# Altium PCB СФ МЭИ ЛБ ПЭ2-18 11.03.04 03.PcbDoc
Units mm, origin at the board's own origin, x right, y up, seen from the top; angles counter-clockwise.
Board outline 28.93 x 15.7 mm, 2 copper layers (Top Layer, Bottom Layer); 14 components, 7 nets, 29 pads, 4 vias.
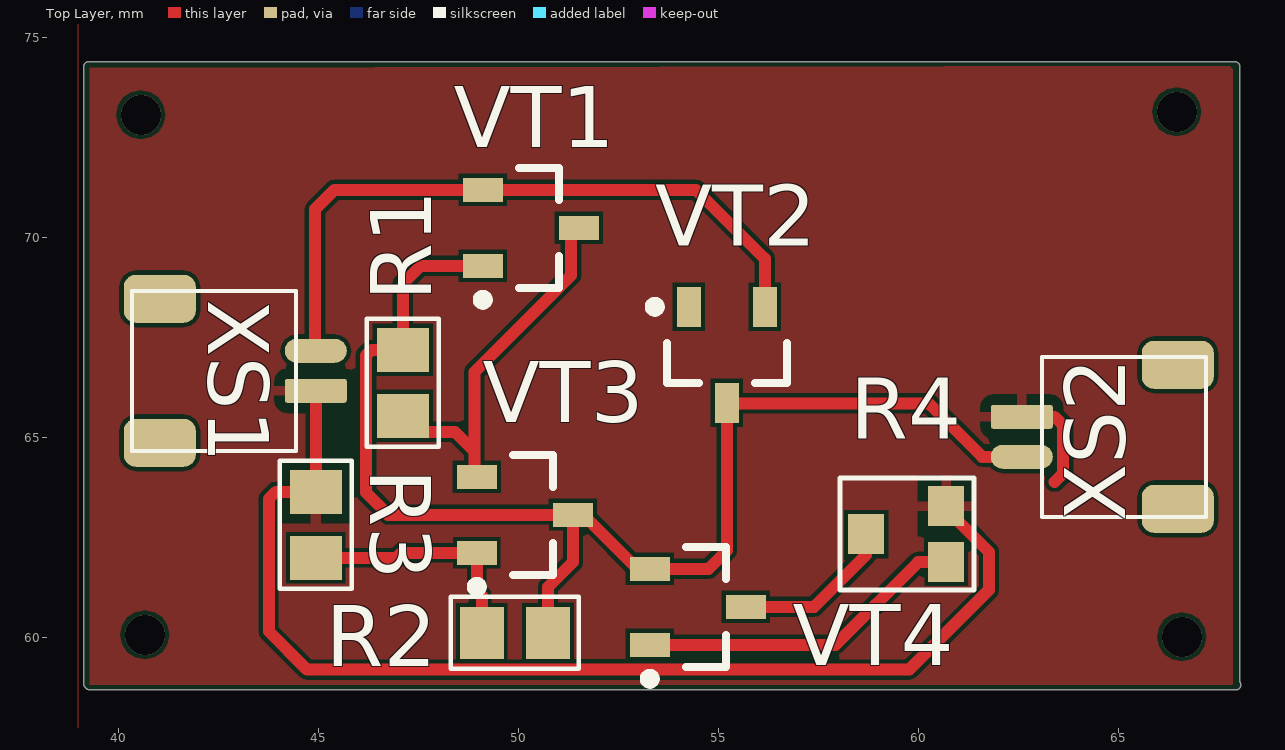
[diagram p0: Top Layer view]
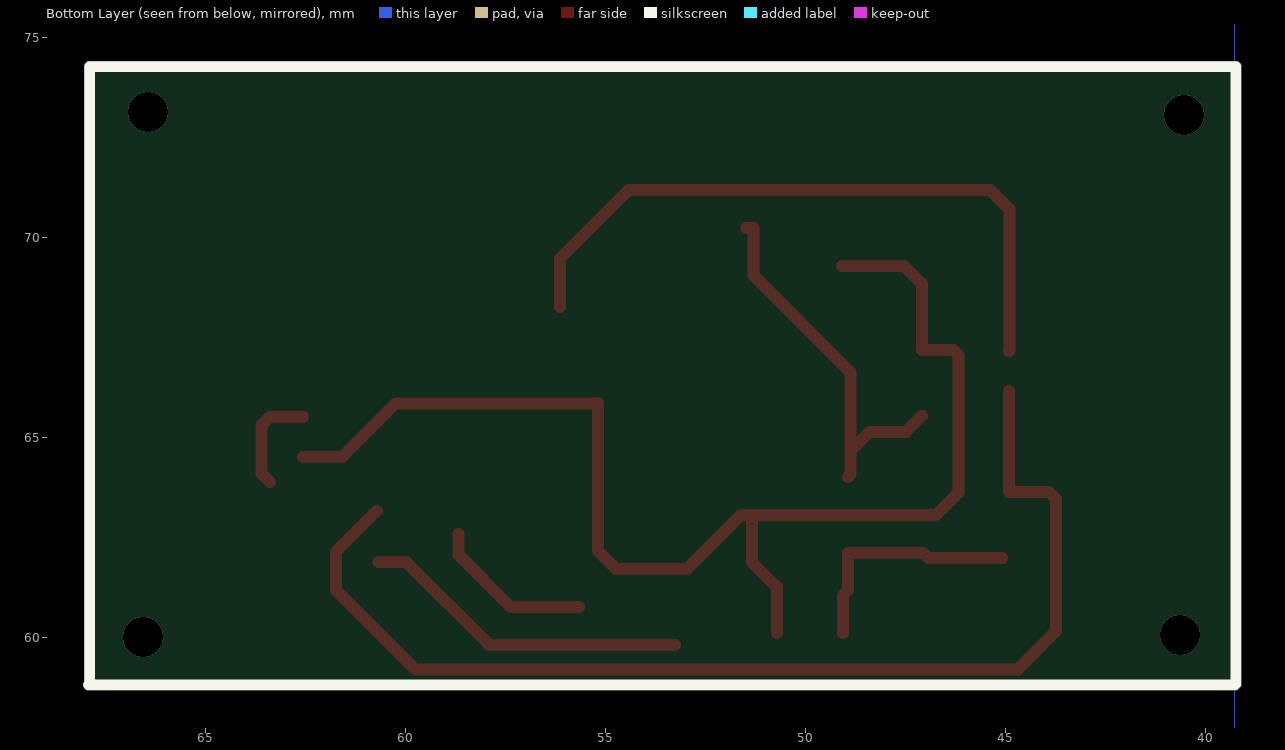
[diagram p1: Bottom Layer view, seen from below]

## Layer stack, top to bottom
Top Solder: solder mask 0.0102, Solder Resist, Dk 3.5
Top Layer: signal copper 0.0356
Dielectric 1: dielectric 0.32, FR-4, Dk 4.8
Bottom Layer: signal copper 0.0356
Bottom Solder: solder mask 0.0102, Solder Resist, Dk 3.5

## Board outline
39.185,58.735 39.16,58.76 39.16,58.759 cw(c39.25,58.85) 39.123,58.85 39.123,74.275 cw(c39.25,74.275) 39.25,74.402 67.9,74.402 cw(c67.9,74.275) 68.027,74.275 68.027,58.901 cw(c67.925,58.825) 68.052,58.825 cw(c67.925,58.825) 67.925,58.698 39.275,58.698 cw(c39.275,58.825)

## Design rules (kind name [scope] priority, off if disabled: settings)
Clearance [All] p1: gap=0.1 ignorepadtopadclearanceinfootprint=FALSE except(0: Arc-Hole Track-Hole SMDPad-Hole THPad-Hole Via-Hole Fill-Hole Poly-Hole Region-Hole Text-Hole)
MinimumAnnularRing MinimumAnnularRing_1 [All] p1: minimumring=0.254
MinimumAnnularRing [All] p2: minimumring=0.254
PolygonConnect [All] p1: connectstyle=Relief reliefconductorwidth=0.254 reliefentries=4 polygonreliefangle="90 Angle" airgapwidth=0.254
RoutingVias [All] p1: holewidth=0.1 width=1.27 viastyle="Through Hole" minholewidth=0.2 minwidth=0.4 maxholewidth=0.2 maxwidth=0.4
SolderMaskExpansion [All] p1: expansion=0.102 istentingtop=FALSE
Width [All] p1: maxlimit=1 minlimit=0.1 preferedwidth=0.3
30 further rules are at their usual default settings.

## Classes and differential pairs
component class "СФ МЭИ ЛБ ПЭ2-18 11.03.04 03 Э3": R1 R2 R3 R4 VT1 VT2 VT3 VT4 XS1 XS2

## Components (designator, comment, footprint, x,y, rotation, side; value= is the part's Value field where it differs from the comment)
R1 "100k" 0805 47.1,66.375 r90 top
R2 "6.2k" 0805 49.9,60.125 r0 top
R3 "6.2k" 0805 44.925,62.825 r270 top
R4 "6.8K" ST32 59.683,62.191 r0 top
VT1 "Полевойтранзистор с изолированым затвором" SOT23 50.3,70.25 r0 top
VT2 "Биполярный транзистор n-p-n" SOT23 55.2,67.075 r270 top
VT3 "Биполярный транзистор n-p-n" SOT23 50.15,63.075 r0 top
VT4 "Полевой транзистор с изолированым затвором n-типа" SOT23 54.475,60.775 r0 top
XS1 "DG126-5.0-0.2P" "CI1102M1H  (F)" 42.725,68.675 r270 top
XS2 "DG126-5.0-0.2P_1" "CI1102M1H  (F)" 64.775,63.025 r90 top
ZBOAS119291683 "Comment" "BOASVIEWdrill:Таблица отверстий:0:0:0:0" 30.3,2328.75 r0 top
ZBOAS278393318 "Comment" "BOASVIEWside:Вид платы сверху:4:0:0:0" 70.7,2370.3 r0 top
ZBOAS291694940 "Comment" "BOASVIEWdrilldrawing:Вид DrillDrawing:4:0:0:1" 74.075,2411.5 r0 top
ZBOAS1939793693 "Comment" "BOASVIEWassembly:Вид спереди для сборочного:4:1:0:101" 492.7,2379.825 r0 top

## Footprints (in the part's own frame and the unit in brackets; to place one, negate y for a bottom-side part, rotate by r counter-clockwise, add the part's x,y. Pads: shape width x height; smd on the part's side, far side on the other; paste and mask are expansions set on the pad)
0805 [mm] "Чип (SMD)"
  rect 1.1x1.3 smd: 1(-0.825,0) 2(0.825,0)
  silkscreen extent -1.6,-0.9 1.6,0.9, body extent -1,-0.63 1,0.63, height 0.5
"BOASVIEWassembly:Вид спереди для сборочного:4:1:0:101" [mm]
"BOASVIEWdrill:Таблица отверстий:0:0:0:0" [mm]
"BOASVIEWdrilldrawing:Вид DrillDrawing:4:0:0:1" [mm]
"BOASVIEWside:Вид платы сверху:4:0:0:0" [mm]
"CI1102M1H  (F)" [mm]
  oval 0.6x1.55 smd: 1(1.5,2.2)
  rrect20% 0.6x1.55 smd: 2(2.5,2.2)
  rrect50% 1.2x1.8 smd: 3(0.2,-1.7) 4(3.8,-1.7)
  silkscreen extent 0,-2.4 4,1.7
SOT23 [mm] "SOT23, 3-Leads, Body 2,92x2,45mm, Pitch 0,95mm, IPC Medium Density"
  rect 1x0.6 smd: 1(-1.2,-0.95) 2(-1.2,0.95) 3(1.2,0)
  silkscreen extent -1.32,-1.92 0.7,1.5, body extent -1.3,-1.52 1.3,1.52, height 1.12
ST32 [mm] "Чип (SMD) поджстроечный"
  rect 0.9x1 smd: 1(-1,0.4) 2(1,1.1) 3(1,-0.3)
  silkscreen extent -1.65,-1 1.7,1.8, body extent -1,-0.63 1,1.53, height 0.5

## Part data
R1: library part "0.125Вт 0805 100 кОм, 5%, Чип резистор (SMD)", "0805-0.125 Вт -100 кОм±5%"
R2 R3: library part "0.125Вт 0805 6.2 кОм, 5%, Чип резистор (SMD)", "0805-0.125 Вт -6.2 кОм±5%"
R4: library part "0.125Вт 0805 6.8 кОм, 5%, подстроечный чип резистор (SMD)", "0805-0.125 Вт -6.8 кОм±5%"
VT1: library part IRFML8244TRPBF, "IRFML8244TRPBF"
VT2: library part BFR540, "BFR540"
VT3: library part BFR540_1, "BFR540"
VT4: library part "BSS83P H6327XTSA1", "BSS83P H6327XTSA1"
XS2: "DG126-5.0-0.2P"

## Via types
v1: diameter 1, hole 1, Top Layer to Bottom Layer, 4 vias

## Nets (pads, with @x,y where several pads share a name; then routed paths per layer and width w, separated by ;. In a path a pad name is that pad's centre, name@x,y a point inside that pad or via, vN(x,y) a via of type N, cw(c..) or ccw(c..) an arc to the next point about the centre after c; other vN are vias at no path point)
GND: R3.1 R4.2 XS1.2 XS2.2 | length 31.3
  Top Layer w0.3: XS1.2 R3.1 43.926,63.65 43.75,63.474 43.75,60.161 44.704,59.207 59.762,59.207 61.75,61.195 61.75,62.15 R4.2@60.725,63.175 ; XS2.2 63.398,65.525 63.602,65.322 63.602,64.103 63.398,63.9
NetR1_1: R1.1 VT1.3 VT3.2 | length 9.6
  Top Layer w0.3: R1.1 47.5,65.15 48.404,65.15 48.888,64.666 ; VT3.2 48.888,64.088 48.888,64.666 ; VT1.3 51.308,70.25 51.308,69.063 48.888,66.642 48.888,64.666
NetR1_2: R1.2 R2.2 VT1.1 VT2.3 VT3.3 VT4.2 XS2.1 | length 33.1
  Top Layer w0.3: VT1.1 47.549,69.3 47.1,68.851 R1.2 46.321,67.2 46.177,67.056 46.177,63.634 46.736,63.075 VT3.3 ; R2.2 50.725,61.265 51.35,61.89 VT3.3 ; VT2.3 VT2.3@55.2,65.862 ; XS2.1 61.586,64.525 60.249,65.862 VT2.3@55.2,65.862 ; VT3.3 51.613,63.075 52.963,61.725 VT4.2 54.746,61.725 55.2,62.179 VT2.3@55.2,65.862
NetR2_1: R2.1 R3.2 VT3.1 | length 6
  Top Layer w0.3: R3.2@45.1,62 46.939,62 47.064,62.125 VT3.1 48.95,61.187 49.075,61.062 R2.1
NetR4_1: R4.1 VT4.3 | length 4.1
  Top Layer w0.3: VT4.3 57.384,60.775 58.683,62.075 R4.1
NetR4_3: R4.3 VT4.1 | length 8.3
  Top Layer w0.3: VT4.1 57.918,59.825 59.984,61.891 R4.3
NetVT1_2: VT1.2 VT2.2 XS1.1 | length 16.9
  Top Layer w0.3: XS1.1 44.907,67.175 44.907,70.714 45.394,71.2 49.1,71.2 54.428,71.2 56.15,69.478 VT2.2
pads on no net: VT2.1 XS1.3 XS1.4 XS2.3 XS2.4
copper on no net:
  other v1: 66.575,60.025 40.65,60.075 40.55,73.075 66.45,73.15

## Polygon pours and split planes (outlines as drawn)
no net on Bottom Layer "GND A" (solid, shelved, pour order 7): 39.275,46.375 39.275,96.4 142.075,96.4 142.075,46.375
GND on Top Layer "GND_L01_P016" (solid, pour order 16): 39.275,74.25 39.275,58.825 67.875,58.825 67.85,58.85 67.85,74.3
no net on Top Layer "GND A" (solid, shelved, pour order 6): 38.981,46.316 38.981,96.341 141.781,96.341 141.781,46.316
no net on Top Overlay "NONET_L01_P-001" (solid): 39.325,73.95

## Silkscreen, mask and mechanical layers (free items; w line width, h text height)
Bottom Overlay:
  lines w0.254: 39.25,58.85 39.275,58.825 ; 39.25,58.85 39.25,74.275 67.9,74.275 67.9,58.85 67.925,58.825 39.275,58.825 ; 39.25,58.85 39.275,58.825
Mechanical 7:
  text "BOASFORMAT|А3|1|0|883070867|165354330|1000000000|4:1|" at 0,2540 h0
  text "BOASFORMAT|А3|101|165354330|883070867|330708660|1000000000|4:1|" at 420,2540 h0
  text "DimV|-442914|-24557086|29389764|974192913|-11230315|118111|4||||js12|False|False|False|False" at 74.65,2474.45 h0
  text "DimH|-45344488|0|74399606|974192913|-44232283|9114174|4||||js12|False|False|False|False" at 188.975,2474.45 h0
  text "DimPos|211269685|956417323|-14301181|-14665354|8|1584121" at 572.95,2466.55 h0
  text "DimPos|102903543|965974409|13061023|-4557087|2|1772217" at 228.2,2465.15 h0
  text "DimPos|141751969|963956693|-10295275|-5620079|2|1772217" at 386.2,2462.725 h0
  text "DimPos|220600394|951525591|-17598425|-14842519|6|1454805" at 605.025,2454.575 h0
  text "DimPos|206200787|950108268|15108267|-15551181|5|1742827" at 485.375,2452.775 h0
  text "DimPos|222312992|950935039|-22185039|-10246063|10|2286542" at 621.025,2441.4 h0
  text "DimPos|236328740|947086614|-21417323|-14045276|2|1772217" at 654.675,2441.275 h0
  text "DimPos|197755906|948769685|15728347|-9163386|2|1772217" at 462.35,2433.15 h0
  text "DimPos|202736220|941486220|20442913|-2667323|3|1537097" at 463.025,2398.15 h0
  text "DimPos|229330709|943080709|-18159448|7194882|8|1584121" at 628.625,2377.15 h0
  text "DimPos|209753937|942903543|17509843|14478346|6|1454805" at 488.3,2358.2 h0
  text "DimPos|227972441|942460630|-11112205|15994095|7|1416598" at 607.275,2353.225 h0
  text "DimPos|210285433|938907480|4793307|13061023|3|1537097" at 521.95,2351.65 h0
  text "DimPos|220068898|939173228|-2391732|15019685|7|1416598" at 565.05,2347.35 h0
  text "SET2|Superlayer=MechanicalLayer7|Wsuperlayer=MechanicalLayer8|Layergrid=MechanicalLayer9|Werase=MechanicalLayer11|Layermark=MechanicalLayer12|Layerstamp=MechanicalLayer13|Thinline=0,18|Basicline=0,6|Gridline=0,18|Boardline=0,6|Contourpolygonline=0,6|PcbGridStep=1,25|PcbGridCleareanceAtView=0|PcbGridNumberEach=l4|PcbGridLineEach=l2|PcbGridCountSecondaryStrip=1|PcbGridEnabledStrip=True|PcbSignalGridEnabled=True|PcbSignalShowBukva=True|RealSignalLayerNames=False|PcbGridEnabledBothSide=False|RealLayerNames=False|SilkShowPad=False|SilkViewName=Слой маркировки|SilkShowHole=True|SilkShowAxis=True|SilkShowBukva=True|SilkShowGrid=False|SolderShowGrid=False|SolderViewName=Слой маски|SolderShowAxis=False|SolderShowBukva=False|MainViewShowGrid=False|MainViewUseShapesDrill=False|ShowBukvaOnSboky=True|Density=2,2|TableName=Таблица 1|RazrezWidth=100|Sher=Rz 160|Asstoplayer=MechanicalLayer1|Asstoplayer2=MechanicalLayer15|Assbottomlayer=MechanicalLayer2|Assbottomlayer2=None|AssMinDiameterHoles=2|AssDim=False|AssMech=True|AssSilk=True|AssComponentSilk=True|AssFreeSilk=True|AssSmdPads=False|AssGridEnable=False|Mirror=Horisontal|PcbGridFontSize=5|PcbGridCenterZero=False|TTStampDistance=12|MainFontSize=5|PolyStep=2|PcbDrillDrawingGridEnabled=False|PcbDrillDrawingViewName=Слой сверловки|PcbDrillDrawingShowBukva=False|PcbDrillDrawingShowAxis=False|PcbSignalLayersUseDrill=False|PcbSignalLayersUseShapesDrill=False|PcbSignalLayersShowAxis=False" at 0,0.025 h0
  text "2TT0008# 9. Приклеить радиаторы на теплопроводный клей Радиал" at 0,0 h0
  text "2TT0007#  8 Клеймить." at 0,0 h0
  text "2TT0006#  7 Маркировать обозначение и заводской номер печатного узла черной краской МКЭ ОСТ 4ГО.054.2050М2 шрифтом 3,5 или 5 тип А ГОСТ 2.304-81, вместе, удобном для чтения." at 0,0 h0
  text "2TT0005#  6 Покрытие лак УР-231 ТУ6-21-14-90(3). Допускается покрытие лаком ЭП-730 ГОСТ 20824-81(3)." at 0,0 h0
  text "2TT0004#  5 Элементы поверхностного монтажа паять припойной пастой ПОС-61 ЛОК ТУ 400 К''Р''-1805-22-91, флюс ФПС-3 ТУ400 СП \"ЭВ\"-2178-137-98." at 0,0 h0
  text "2TT0003#  4 Меры защиты от статического электричества по ОСТ 92-1615-74. Степень жесткости II по ОСТ11.073.062-2001." at 0,0 h0
  text "2TT0002#  3** Размеры обеспеч. инстр." at 0,0 h0
  text "2TT0001#  2* Размеры для справок." at 0,0 h0
  text "2TT0000#  1 Установку элементов производить по чертежу." at 0,0 h0
  text "TT0016#  17 Клеймить краской МКЭ любого цвета по ОСТ4 ГО.054.205 ОМ2." at 0,0 h0
  text "TT0015#  16 Маркировать месяц и год изготовления черной краской МКЭ ОСТ4 ГО.054.205 ОМ2 по инструкции И-75-89 шрифтом 3,5 или 5 тип А ГОСТ 2.304-81." at 0,0 h0
  text "TT0014#  15 Покрытие контактных площадок и металлизированных отверстий Хим. Мм Гор. ПОС-63, ГОСТ 21930-76." at 0,0 h0
  text "TT0013#  14 Покрытие печатной платы защитной паяльной маской TAIYO PSR-4000 H855/CA-40 H855 фирма «TAIYO INK»  с двух сторон, кроме контактных площадок. Допускается отсутствие покрытия вокруг контактных площадок, включая проводники и полигоны, на размере не более 0,5 мм от края контактной площадки. Допускается отсутствие покрытия по контуру платы и вокруг неметаллизированных отверстий на размере не более 1,1 мм." at 0,0 h0
  text "TT0012#  13 Покрытие проводящего рисунка платы Хим. Мм." at 0,0 h0
  text "TT0011#  12 Допускается полное или частичное заполнение припоем переходных отверстий, их диаметры контролю не подлежат." at 0,0 h0
  text "TT0010#  11 Предельные отклонения расстояний между центрами отверстий ±0,2 мм, кроме оговоренных особо." at 0,0 h0
  text "TT0009#  10 Форма контактной площадки произвольная. Допускается занижение контактных площадок до 0,05 мм от края отверстия." at 0,0 h0
  text "TT0008#  9 Расстояние между печатными проводниками и контактными площадками не менее 0,2 мм." at 0,0 h0
  text "TT0007#  8 Ширина печатных проводников не менее (0,25±0,05) мм." at 0,0 h0
  text "TT0006#  7 Места, обведенные штрихпунктирной линией, печатными проводниками и контактными площадками не занимать." at 0,0 h0
  text "TT0005#  6 Конфигурацию печатных проводников выдерживать по координатной сетке с отклонениями от чертежа ±1,5 мм." at 0,0 h0
  text "TT0004#  5 Шаг координатной сетки 1,25 мм. Линии сетки нанесены через одну." at 0,0 h0
  text "TT0003#  4 Печатная плата должна соответствовать ГОСТ Р 53429-2009, группе жесткости 3 при верхнем значении температуры окружающей среды (85±2) °С." at 0,0 h0
  text "TT0002#  3 Класс точности 3 по ГОСТ Р 53429-2009." at 0,0 h0
  text "TT0001#  2 ** Размер обеспеч. инстр." at 0,0 h0
  text "TT0000#  1 *  Размер для справок." at 0,0 h0
  text "2STAMP|Разработал|Гончаренко А.Ю." at 0,0 h0
  text "2STAMP|Проверил|Смолин В.А." at 0,0 h0
  text "2STAMP|Утвердил|Рассказа Д.С." at 0,0 h0
  text "2STAMP|Var|Нач. отд." at 0,0 h0
  text "2STAMP|Tech|Т.контр." at 0,0 h0
  text "2STAMP|Normo|Н.контр." at 0,0 h0
  text "2STAMP|Check|Пров." at 0,0 h0
  text "2STAMP|Design|Разраб." at 0,0 h0
  text "2STAMP|Utv|Утв." at 0,0 h0
  text "2STAMP|Обозначение|СФ МЭИ ЛБ ПЭ2-18 11.03.04 02 СБ" at 0,0 h0
  text "2STAMP|Первичная применяемость|СФ МЭИ ЛБ ПЭ2-18 11.03.04 02" at 0,0 h0
  text "2STAMP|Организация|НИУ СФ МЭИ ПЭ2-18" at 0,0 h0
  text "2STAMP|Наименование1|Стабилизатор напряжения" at 0,0 h0
  text "2STAMP|Наименование2|Сборочный чертёж" at 0,0 h0
  text "STAMP|Наименование1|Стабилизатор" at 0,0 h0
  text "STAMP|Наименование2|напряжения" at 0,0 h0
  text "STAMP|Разработал|Гончаренко А.Ю." at 0,0 h0
  text "STAMP|Проверил|Смолин В.А." at 0,0 h0
  text "STAMP|Утвердил|Рассказа Д.С." at 0,0 h0
  text "STAMP|Var|Нач. отд." at 0,0 h0
  text "STAMP|Tech|Т.контр." at 0,0 h0
  text "STAMP|Normo|Н.контр." at 0,0 h0
  text "STAMP|Check|Пров." at 0,0 h0
  text "STAMP|Design|Разраб." at 0,0 h0
  text "STAMP|Utv|Утв." at 0,0 h0
  text "STAMP|Обозначение|СФ МЭИ ЛБ ПЭ2-18 11.03.04 02" at 0,0 h0
  text "STAMP|Первичная применяемость|СФ МЭИ ЛБ ПЭ2-18 11.03.04 02" at 0,0 h0
  text "STAMP|Организация|НИУ СФ МЭИ ПЭ2-18" at 0,0 h0
  text "BOASVIADRILLTABLE:none,393701,4," at 0,0 h0
  text "2BOASDRILLTABLE:" at 0,0 h0
Mechanical 8:
  region: 46.033,2474.358 45.386,2472.665 44.895,2468.951 46.029,2468.95 46.03,2469.882 45.467,2469.45 46.122,2474.357
  region: 46.217,2474.358 46.864,2472.665 47.355,2468.951 46.221,2468.95 46.22,2469.882 46.783,2469.45 46.128,2474.357
  region: 46.217,2412.167 46.864,2413.86 47.355,2417.574 46.221,2417.575 46.22,2416.643 46.783,2417.075 46.128,2412.168
  region: 46.033,2412.167 45.386,2413.86 44.895,2417.574 46.029,2417.575 46.03,2416.643 45.467,2417.075 46.122,2412.168
  region: 73.892,2497.508 75.585,2496.861 79.299,2496.37 79.3,2497.504 78.368,2497.505 78.8,2496.942 73.893,2497.597
  region: 73.892,2497.692 75.585,2498.339 79.299,2498.83 79.3,2497.696 78.368,2497.695 78.8,2498.258 73.893,2497.603
  region: 188.883,2497.692 187.19,2498.339 183.476,2498.83 183.475,2497.696 184.407,2497.695 183.975,2498.258 188.882,2497.603
  region: 188.883,2497.508 187.19,2496.861 183.476,2496.37 183.475,2497.504 184.407,2497.505 183.975,2496.942 188.882,2497.597
  region: 70.388,2370.529 69.741,2368.837 69.25,2365.122 70.385,2365.121 70.386,2366.053 69.822,2365.621 70.478,2370.529
  region: 70.573,2370.529 71.22,2368.837 71.711,2365.122 70.577,2365.121 70.576,2366.053 71.139,2365.621 70.484,2370.529
  region: 70.573,2371.614 71.22,2373.306 71.711,2377.021 70.577,2377.021 70.576,2376.09 71.139,2376.521 70.484,2371.614
  region: 70.388,2371.614 69.741,2373.306 69.25,2377.021 70.385,2377.021 70.386,2376.09 69.822,2376.521 70.478,2371.614
Mechanical 9:
  circle w0.6: c564.675,2415.375 r0.2
  circle w0.6: c582.5,2395.425 r0.2
  circle w0.6: c523.75,2413.275 r0.2
  circle w0.6: c536.625,2429.3 r0.2
  circle w0.6: c560.325,2416.875 r0.2
  circle w0.6: c579.05,2393.85 r0.2
  circle w0.6: c558.975,2385.5 r0.2
  circle w0.6: c534.125,2384.825 r0.2
  circle w0.6: c532.775,2394.975 r0.2
  circle w0.6: c514.95,2391.375 r0.2
  circle w0.6: c502.3,2409.875 r0.2
  circle w0.6: c600.275,2405.6 r0.2
  region: 46.125,2474.45 46.783,2469.45 46.125,2469.95 45.467,2469.45
  region: 46.125,2412.075 45.467,2417.075 46.125,2416.575 46.783,2417.075
  region: 73.8,2497.6 78.8,2498.258 78.3,2497.6 78.8,2496.942
  region: 188.975,2497.6 183.975,2496.942 184.475,2497.6 183.975,2498.258
  region: 70.481,2370.621 71.139,2365.621 70.481,2366.121 69.822,2365.621
  region: 70.481,2371.521 69.822,2376.521 70.481,2376.021 71.139,2376.521
  lines w0.18: 45.125,2412.075 73.525,2412.075 ; 45.125,2474.45 74.65,2474.45 ; 46.125,2412.075 46.125,2474.45 ; 70.481,2351.345 70.481,2379.521 ; 73.8,2474.45 73.8,2498.6 ; 73.8,2497.6 188.975,2497.6 ; 188.975,2474.45 188.975,2498.6 ; 452.849,2433.15 462.35,2433.15 502.3,2409.875 ; 454.121,2398.15 463.025,2398.15 514.95,2391.375 ; 475.948,2452.775 485.375,2452.775 523.75,2413.275 ; 479.605,2358.2 488.3,2358.2 532.775,2394.975 ; 513.046,2351.65 521.95,2351.65 534.125,2384.825 ; 536.625,2429.3 572.95,2466.55 581.974,2466.55 ; 558.975,2385.5 565.05,2347.35 573.648,2347.35 ; 560.325,2416.875 605.025,2454.575 613.72,2454.575 ; 564.675,2415.375 621.025,2441.4 631.833,2441.4 ; 579.05,2393.85 607.275,2353.225 615.873,2353.225 ; 582.5,2395.425 628.625,2377.15 637.649,2377.15 ; 600.275,2405.6 654.675,2441.275 664.176,2441.275
  text "28,79" at 125.246,2500.13 h7.68
  text "9" at 575.45,2469.08 h10.75
  text "6" at 607.525,2457.105 h10.75
  text "5" at 478.448,2455.305 h10.75
  text "8" at 623.525,2443.93 h10.75
  text "2" at 657.175,2443.805 h10.75
  text "15,59" at 43.595,2438.328 h7.68 r90
  text "2" at 455.349,2435.68 h10.75
  text "3" at 456.621,2400.68 h10.75
  text "9" at 631.125,2379.68 h10.75
  text "6" at 482.105,2360.73 h10.75
  text "7" at 609.775,2355.755 h10.75
  text "0,45" at 67.951,2355.465 h7.68 r90
  text "3" at 515.546,2354.18 h10.75
  text "7" at 567.55,2349.88 h10.75
Mechanical 13:
  lines w0.18: 230,2253 295,2253 ; 230,2258 295,2258 ; 230,2263 295,2263 ; 230,2268 295,2268 ; 230,2273 295,2273 ; 230,2288 295,2288 ; 230,2293 295,2293 ; 230,2298 295,2298 ; 369.96,2268 369.96,2283 ; 374.98,2268 374.98,2283 ; 391.7,2522.1 394.8,2516.7 400.4,2526.5 ; 650,2253 715,2253 ; 650,2258 715,2258 ; 650,2263 715,2263 ; 650,2268 715,2268 ; 650,2273 715,2273 ; 650,2288 715,2288 ; 650,2293 715,2293 ; 650,2298 715,2298 ; 789.96,2268 789.96,2283 ; 794.98,2268 794.98,2283
  lines w0.6: 8,2273 20,2273 ; 8,2308 20,2308 ; 8,2333 20,2333 ; 8,2358 20,2358 ; 8,2475 20,2475 ; 13,2248 13,2393 ; 13,2415 13,2535 ; 20,2393 8,2393 8,2248 20,2248 ; 20,2415 8,2415 8,2535 20,2535 ; 20,2521 90,2521 90,2535 ; 230,2248 230,2303 415,2303 ; 230,2278 295,2278 ; 230,2283 295,2283 ; 237,2278 237,2303 ; 247,2248 247,2303 ; 270,2248 270,2303 ; 285,2248 285,2303 ; 295,2248 295,2303 415,2303 ; 295,2263 365,2263 415,2263 ; 295,2288 415,2288 ; 344,2524 349,2515 356.6,2529 ; 356.7,2529 407,2529 ; 365,2248 365,2288 ; 365,2268 415,2268 ; 365,2283 380,2283 415,2283 ; 380,2268 380,2288 ; 385.57,2263 385.57,2268 ; 397,2268 397,2288 ; 415,2311 415,2303 ; 428,2273 440,2273 ; 428,2308 440,2308 ; 428,2333 440,2333 ; 428,2358 440,2358 ; 428,2475 440,2475 ; 433,2248 433,2393 ; 433,2415 433,2535 ; 440,2393 428,2393 428,2248 440,2248 ; 440,2415 428,2415 428,2535 440,2535 ; 440,2521 510,2521 510,2535 ; 650,2248 650,2303 835,2303 ; 650,2278 715,2278 ; 650,2283 715,2283 ; 657,2278 657,2303 ; 667,2248 667,2303 ; 690,2248 690,2303 ; 705,2248 705,2303 ; 715,2248 715,2303 835,2303 ; 715,2263 785,2263 835,2263 ; 715,2288 835,2288 ; 785,2248 785,2288 ; 785,2268 835,2268 ; 785,2283 800,2283 835,2283 ; 800,2268 800,2288 ; 805.57,2263 805.57,2268 ; 817,2268 817,2288 ; 835,2311 835,2303 ; 20,2248 415,2248 415,2535 20,2535 ; 20,2248 20,2535 ; 440,2248 835,2248 835,2535 440,2535 ; 440,2248 440,2535
  text "СФ МЭИ ЛБ ПЭ2-18 11.03.04 02" at 87.772,2530.109 h7.68 r180
  text "СФ МЭИ ЛБ ПЭ2-18 11.03.04 02 СБ" at 509.51,2530.01 h7.32 r180
  text "Rz 160" at 356.7,2516.7 h10.75
  text "(" at 388,2516.7 h10.75
  text ")" at 399,2516.7 h10.75
  text "Перв. примен." at 11.976,2494.373 h5.38 r90
  text "Перв. примен." at 431.976,2494.373 h5.38 r90
  text "СФ МЭИ ЛБ ПЭ2-18 11.03.04 02" at 17.976,2482.064 h5.38 r90
  text "СФ МЭИ ЛБ ПЭ2-18 11.03.04 02" at 437.976,2482.064 h5.38 r90
  text "Справ. №" at 11.976,2437.78 h5.38 r90
  text "Справ. №" at 431.976,2437.78 h5.38 r90
  text "Подп. и дата" at 11.976,2365.961 h5.38 r90
  text "Подп. и дата" at 431.976,2365.961 h5.38 r90
  text "Инв. № дубл." at 11.976,2336.457 h5.38 r90
  text "Инв. № дубл." at 431.976,2336.457 h5.38 r90
  text "1 *  Размер для справок. /   2 ** Размер обеспеч. инстр. /   3 Класс точности 3 по ГОСТ Р 53429-2009. /   4 Печатная плата должна соответствовать ГОСТ Р 53429-2009, группе жесткости 3 при верхнем значении температуры окружающей среды (85±2) °С. /   5 Шаг координатной сетки 1,25 мм. Линии сетки нанесены через одну. /   6 Конфигурацию печатных проводников выдерживать по координатной сетке с отклонениями от чертежа ±1,5 мм. /   7 Места, обведенные штрихпунктирной линией, печатными проводниками и контактными площадками не занимать. /   8 Ширина печатных проводников не менее (0,25±0,05) мм. /   9 Расстояние между печатными проводниками и контактными площадками не менее 0,2 мм. /   10 Форма контактной площадки произвольная. Допускается занижение контактных площадок до 0,05 мм от края отверстия. /   11 Предельные отклонения расстояний между центрами отверстий ±0,2 мм, кроме оговоренных особо. /   12 Допускается полное или частичное заполнение припоем переходных отверстий, их диаметры контролю не подлежат. /   13 Покрытие проводящего рисунка платы Хим. Мм. /   14 Покрытие печатной платы защитной паяльной маской TAIYO PSR-4000 H855/CA-40 H855 фирма «TAIYO INK»  с двух сторон, кроме контактных площадок. Допускается отсутствие покрытия вокруг контактных площадок, включая проводники и полигоны, на размере не более 0,5 мм от края контактной площадки. Допускается отсутствие покрытия по контуру платы и вокруг неметаллизированных отверстий на размере не более 1,1 мм. /   15 Покрытие контактных площадок и металлизированных отверстий Хим. Мм Гор. ПОС-63, ГОСТ 21930-76. /   16 Маркировать месяц и год изготовления черной краской МКЭ ОСТ4 ГО.054.205 ОМ2 по инструкции И-75-89 шрифтом 3,5 или 5 тип А ГОСТ 2.304-81." at 235,2323 h7.68
  text "1 Установку элементов производить по чертежу. /   2* Размеры для справок. /   3** Размеры обеспеч. инстр. /   4 Меры защиты от статического электричества по ОСТ 92-1615-74. Степень жесткости II по ОСТ11.073.062-2001. /   5 Элементы поверхностного монтажа паять припойной пастой ПОС-61 ЛОК ТУ 400 К''Р''-1805-22-91, флюс ФПС-3 ТУ400 СП \"ЭВ\"-2178-137-98.  /   6 Покрытие лак УР-231 ТУ6-21-14-90(3). Допускается покрытие лаком ЭП-730 ГОСТ 20824-81(3). /   7 Маркировать обозначение и заводской номер печатного узла черной краской МКЭ ОСТ 4ГО.054.2050М2 шрифтом 3,5 или 5 тип А ГОСТ 2.304-81, вместе, удобном для чтения. /   8 Клеймить. /  9. Приклеить радиаторы на теплопроводный клей Радиал" at 655,2323 h7.68
  text "Взам. инв. №" at 11.976,2311.496 h5.38 r90
  text "Взам. инв. №" at 431.976,2311.496 h5.38 r90
  text "СФ МЭИ ЛБ ПЭ2-18 11.03.04 02" at 322.228,2293.391 h7.68
  text "СФ МЭИ ЛБ ПЭ2-18 11.03.04 02 СБ" at 738.799,2293.391 h7.68
  text "Лит." at 369.328,2284.024 h5.38
  text "Масса" at 384.108,2284.024 h5.38
  text "Масштаб" at 399.133,2284.024 h5.38
  text "Лит." at 789.328,2284.024 h5.38
  text "Масса" at 804.108,2284.024 h5.38
  text "Масштаб" at 819.133,2284.024 h5.38
  text "Подп. и дата" at 11.976,2282.461 h5.38 r90
  text "Подп. и дата" at 431.976,2282.461 h5.38 r90
  text "Стабилизатор" at 314.675,2280.891 h7.68
  text "Стабилизатор напряжения" at 721.485,2280.891 h7.68
  text "Изм." at 230.687,2279.024 h5.38
  text "Лист" at 238.024,2279.024 h5.38
  text "№ докум." at 252.271,2279.024 h5.38
  text "Подп." at 273.92,2279.024 h5.38
  text "Дата" at 285.963,2279.024 h5.38
  text "Изм." at 650.687,2279.024 h5.38
  text "Лист" at 658.024,2279.024 h5.38
  text "№ докум." at 672.271,2279.024 h5.38
  text "Подп." at 693.92,2279.024 h5.38
  text "Дата" at 705.963,2279.024 h5.38
  text "Разраб." at 230.533,2273.771 h5.38
  text "Гончаренко А.Ю." at 247.68,2273.771 h5.09
  text "Разраб." at 650.533,2273.771 h5.38
  text "Гончаренко А.Ю." at 667.68,2273.771 h5.09
  text "0 г" at 385.149,2273.391 h7.68
  text "4:1" at 403.065,2273.391 h7.68
  text "4:1" at 823.065,2273.391 h7.68
  text "напряжения" at 317.479,2272.891 h7.68
  text "Сборочный чертёж" at 730.13,2272.891 h7.68
  text "Пров." at 230.533,2268.771 h5.38
  text "Смолин В.А." at 247.68,2268.771 h5.38
  text "Пров." at 650.533,2268.771 h5.38
  text "Смолин В.А." at 667.68,2268.771 h5.38
  text "Т.контр." at 230.533,2263.771 h5.38
  text "Лист" at 366.442,2263.771 h5.38
  text "Листов" at 387.485,2263.771 h5.38
  text "1" at 407.424,2263.771 h5.38
  text "Т.контр." at 650.533,2263.771 h5.38
  text "Лист" at 786.442,2263.771 h5.38
  text "Листов" at 807.485,2263.771 h5.38
  text "1" at 827.424,2263.771 h5.38
  text "Нач. отд." at 230.533,2258.771 h5.38
  text "Нач. отд." at 650.533,2258.771 h5.38
  text "17 Клеймить краской МКЭ любого цвета по ОСТ4 ГО.054.205 ОМ2." at 25,2255 h7.68
  text "Н.контр." at 230.533,2253.771 h5.38
  text "Н.контр." at 650.533,2253.771 h5.38
  text "НИУ СФ МЭИ ПЭ2-18" at 368.285,2253.391 h7.68
  text "НИУ СФ МЭИ ПЭ2-18" at 788.285,2253.391 h7.68
  text "Инв. № подл." at 11.976,2251.457 h5.38 r90
  text "Инв. № подл." at 431.976,2251.457 h5.38 r90
  text "Утв." at 230.533,2248.771 h5.38
  text "Рассказа Д.С." at 247.68,2248.771 h5.38
  text "Утв." at 650.533,2248.771 h5.38
  text "Рассказа Д.С." at 667.68,2248.771 h5.38
  text "Копировал" at 305.533,2243.771 h5.38
  text "Формат А3" at 386.625,2243.771 h5.38
  text "Копировал" at 725.533,2243.771 h5.38
  text "Формат А3" at 806.625,2243.771 h5.38
Mechanical 15:
  lines w0.254: 53.175,64.9 53.2,64.875 57.1,64.875 57.325,64.875 57.325,69.2 57.225,69.3 53.175,69.3 53.175,64.9 ; 57.7,60.874 61.834,60.877 61.834,64.225 57.7,64.225 57.7,60.874

## Dimensions
67.925,58.825 to 67.9,74.275 on Bottom Overlay
39.275,58.825 to 67.925,58.825 on Bottom Overlay

## Text inside footprints (layer, text, board x,y; h text height)
ZBOAS119291683: Mechanical 12 "1,0" at 120.881,2307.641 h7.68; Mechanical 12 "переходное" at 40.647,2307.641 h7.68; Mechanical 12 "Да" at 155.11,2307.641 h7.68; Mechanical 12 "1" at 86.476,2307.641 h7.68; Mechanical 12 "4" at 184.447,2307.641 h7.68; Mechanical 12 "отв." at 181.354,2315.391 h7.68; Mechanical 12 "Кол." at 181.562,2322.891 h7.68; Mechanical 12 "металлизации" at 142.682,2315.391 h7.68; Mechanical 12 "Наличие" at 149.325,2322.891 h7.68; Mechanical 12 "площадки, мм" at 109.024,2315.391 h7.68; Mechanical 12 "Диаметр конт." at 107.8,2322.891 h7.68; Mechanical 12 "мм" at 84.408,2315.391 h7.68; Mechanical 12 "Диаметр отв.," at 72.449,2322.891 h7.68; Mechanical 12 "отв." at 45.139,2315.391 h7.68; Mechanical 12 "Обозначение" at 35.99,2322.891 h7.68; Mechanical 12 "Таблица 1" at 30.3,2330.25 h7.68
ZBOAS1939793693: Mechanical 12 "VT3" at 532.584,2406.588 h6.1; Mechanical 12 "VT1" at 529.7,2434.087 h6.1; Mechanical 12 "VT4" at 563.584,2382.288 h6.1; Mechanical 12 "XS2" at 596.857,2396.709 h6.1 r90; Mechanical 12 "R4" at 569.364,2404.952 h6.1; Mechanical 12 "XS1" at 505.163,2418.844 h6.1 r270; Mechanical 12 "VT2" at 549.874,2424.231 h6.1; Mechanical 12 "R1" at 527.457,2418.672 h6.1 r90; Mechanical 12 "R3" at 521.363,2401.913 h6.1 r270; Mechanical 12 "R2" at 516.931,2382.188 h6.1